# Altium PCB BB_OPAMP.PcbDoc
Units mil, origin at the board's own origin, x right, y up, seen from the top; angles counter-clockwise.
Board outline 1496.06 x 1692.91 mil, 2 copper layers (Top Layer, Bottom Layer); 70 components, 23 nets, 147 pads, 42 vias.
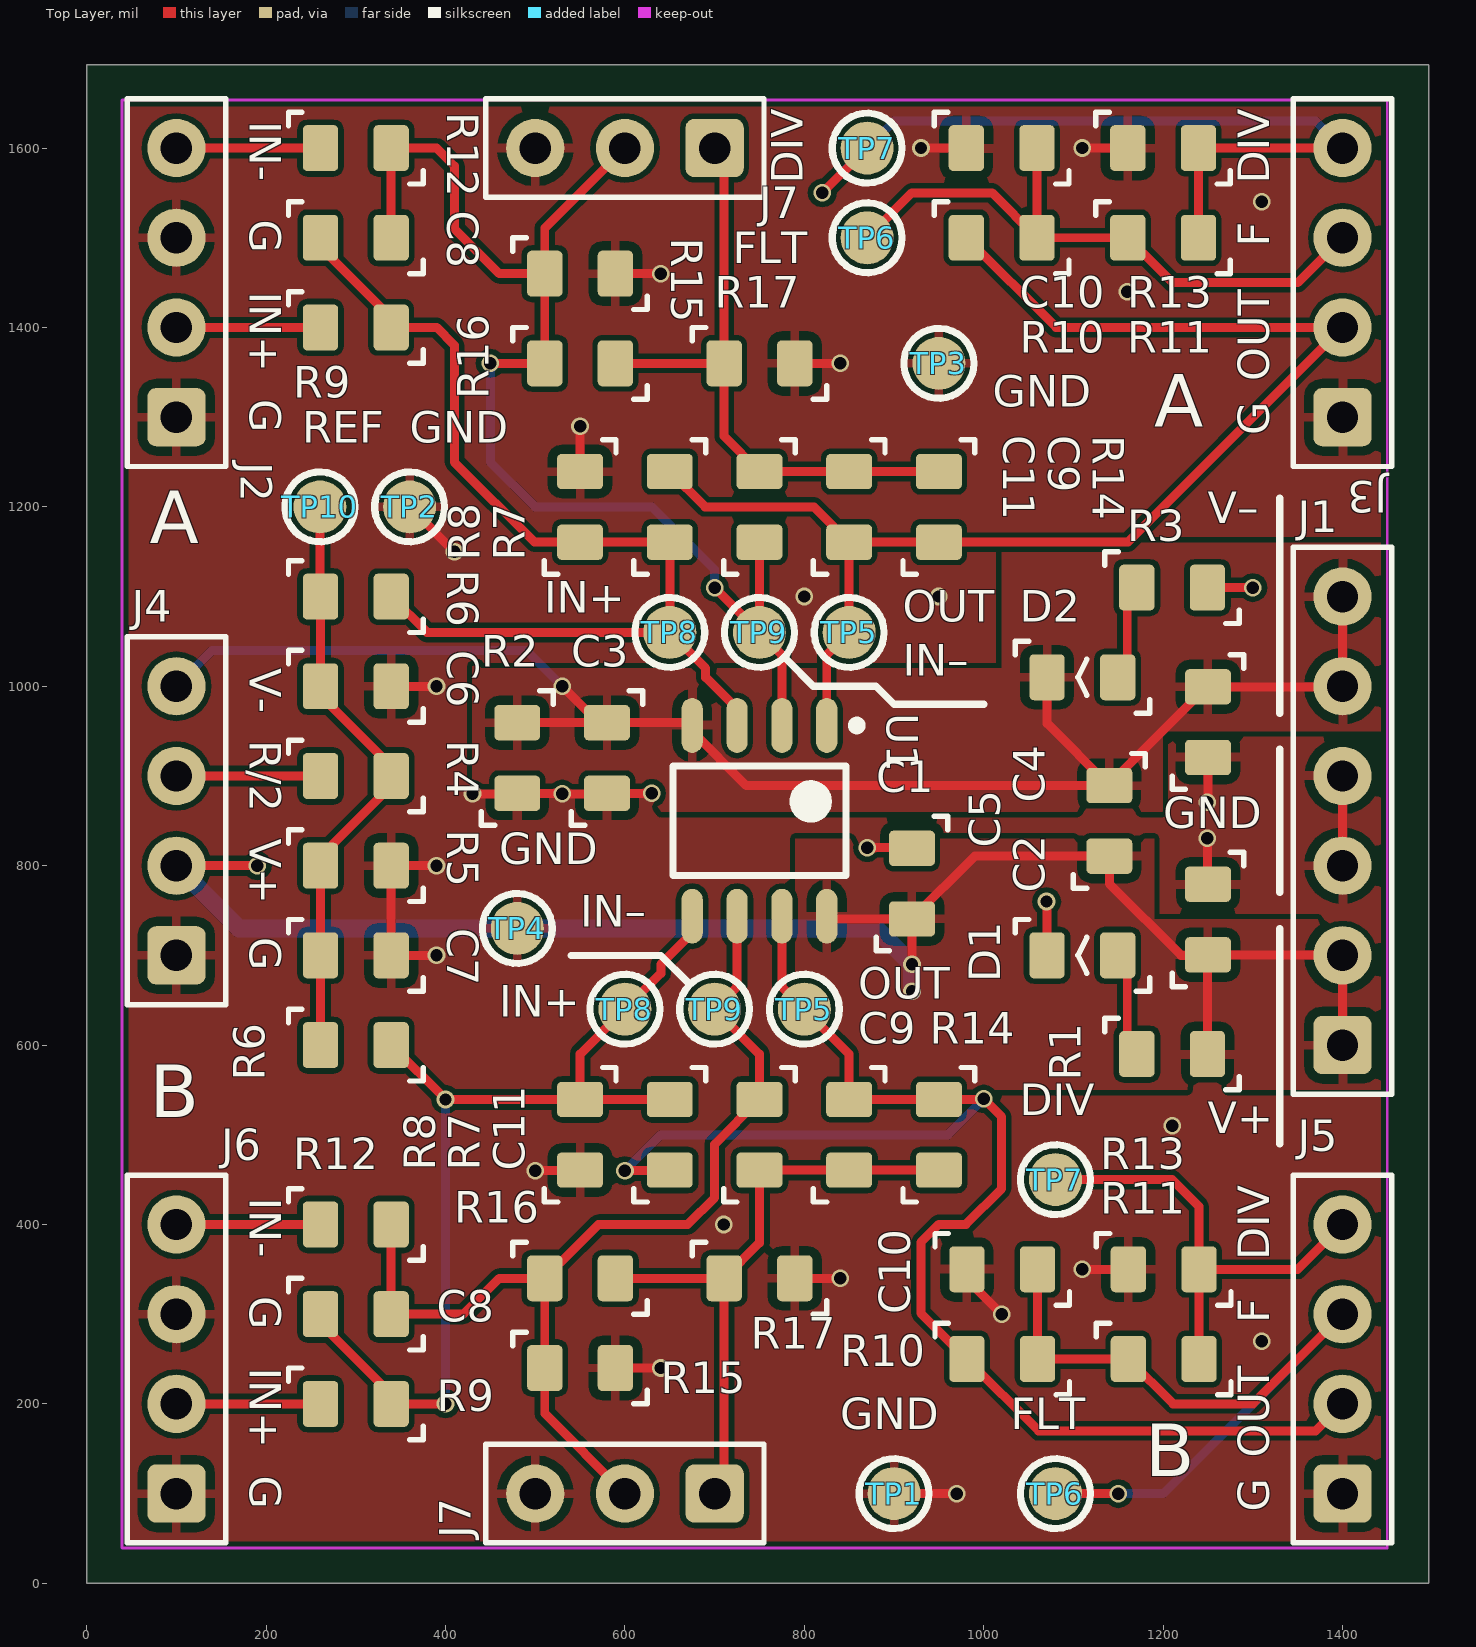
[diagram p0: Top Layer view]
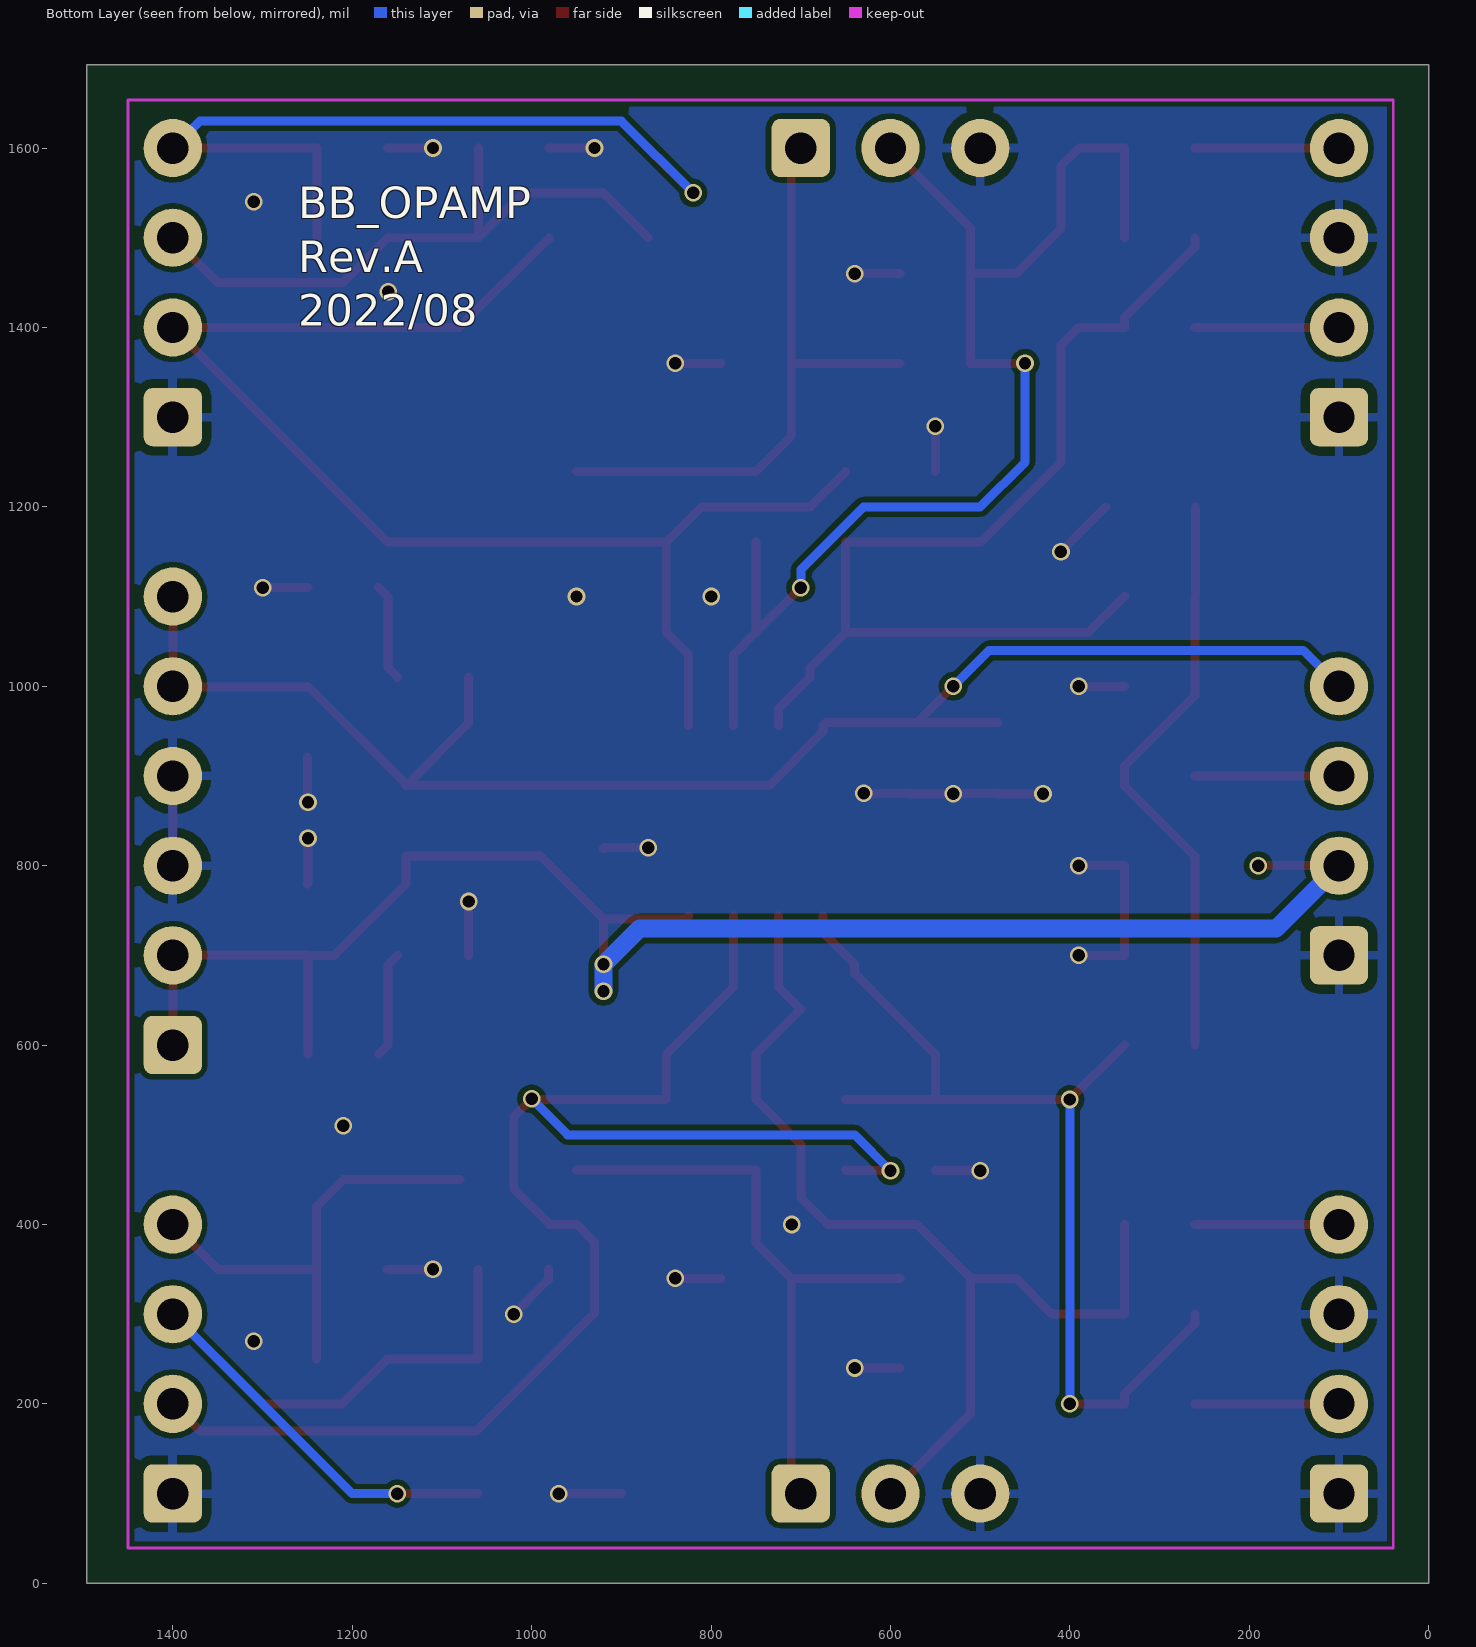
[diagram p1: Bottom Layer view, seen from below]
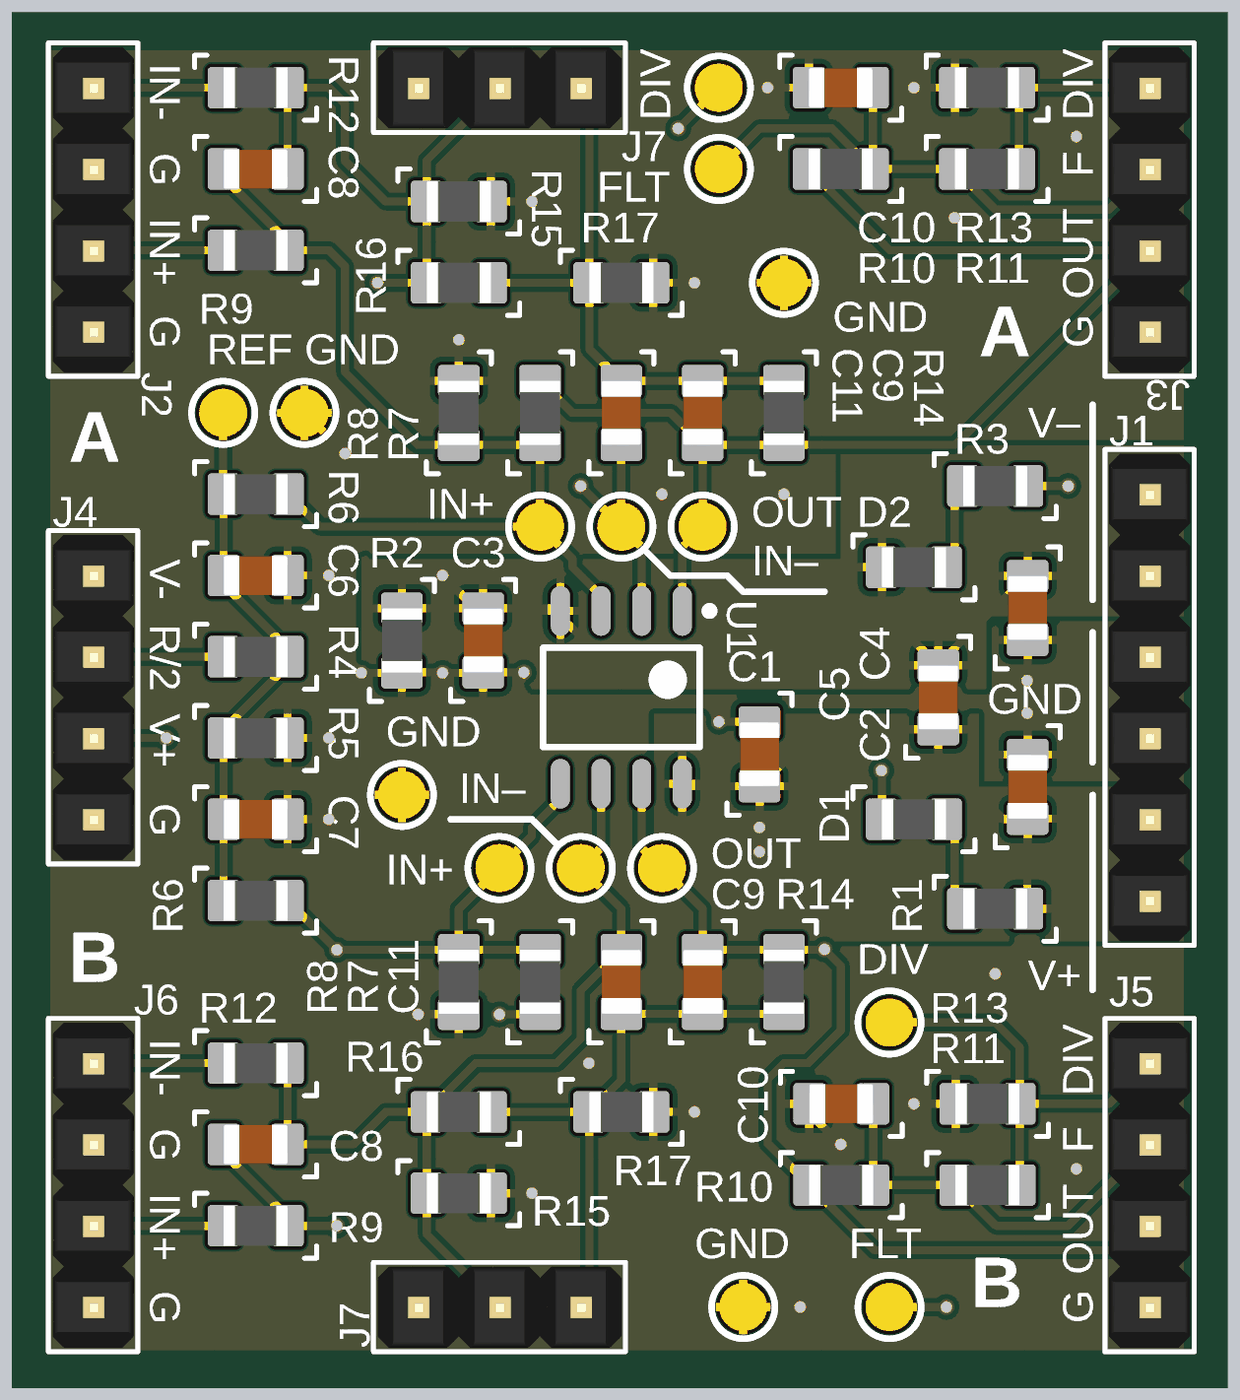
[diagram p2: 3D render of the assembled board from above, using the file's embedded part models]

## Layer stack, top to bottom
Top Solder: solder mask 0.4, Solder Resist, Dk 3.5
Top Layer: signal copper 1.4
Dielectric 1: dielectric 12.6, FR-4, Dk 4.8
Bottom Layer: signal copper 1.4
Bottom Solder: solder mask 0.4, Solder Resist, Dk 3.5

## Board outline
0,0 0,1692.91 1496.06,1692.91 1496.06,0

## Design rules (kind name [scope] priority, off if disabled: settings)
Clearance [All] p1: gap=6 ignorepadtopadclearanceinfootprint=FALSE
PolygonConnect [All] p1: thpad.connectstyle=Relief thpad.reliefconductorwidth=10 thpad.reliefentries=4 thpad.polygonreliefangle="90 Angle" thpad.airgapwidth=10 smdpad.connectstyle=Relief smdpad.reliefconductorwidth=10 smdpad.reliefentries=4 smdpad.polygonreliefangle="90 Angle" smdpad.airgapwidth=10 via.connectstyle=Direct via.reliefconductorwidth=10 via.reliefentries=4 via.polygonreliefangle="90 Angle" via.airgapwidth=10
RoomDefinition B [InComponentClass('B')] p1 off: confinementstyle=ConfineIn formatcopy=TRUE lockcomponents=FALSE outline -280,-560 1690,-560 1690,-90 -280,-90
RoomDefinition A [InComponentClass('A')] p2 off: confinementstyle=ConfineIn formatcopy=TRUE lockcomponents=FALSE outline -230,1730 1640,1730 1640,2310 -230,2310
RoutingVias [All] p1: holewidth=28 width=50 viastyle="Through Hole" minholewidth=28 minwidth=50 maxholewidth=28 maxwidth=50
SolderMaskExpansion [All] p1: expansion=4
UnRoutedNet [All] p1: checkbadconnections=TRUE
Width [All] p1: maxlimit=20 minlimit=6 preferedwidth=10
29 further rules are at their usual default settings.

## Classes and differential pairs
channel class Analog: A B
component class B: C8 C9 C10 C11 J7 R6 R7 R8 R9 R10 R11 R12 R13 R14 R15 R16 R17 TP5 TP6 TP7 TP8 TP9
component class A: C8 C9 C10 C11 J7 R6 R7 R8 R9 R10 R11 R12 R13 R14 R15 R16 R17 TP5 TP6 TP7 TP8 TP9
component class Breakout: C1 C2 C3 C4 C5 C6 C7 D1 D2 J1 J2 J3 J4 J5 J6 J8 R1 R2 R3 R4 R5 TP1 TP2 TP3 TP4 TP10 U1

## Components (designator, comment, footprint, x,y, rotation, side; value= is the part's Value field where it differs from the comment)
C1 "100nF" 0805C_RF_M 920,780 r270 top
C2 "10uF" 0805C_RF_M 1250,740 r270 top
C3 "100nF" 0805C_RF_M 580,920 r90 top
C4 "10uF" 0805C_RF_M 1250,960 r90 top
C5 "100nF" 0805C_RF_M 1140,850 r270 top
C6 "100nF" 0805C_RF_M 300,1000 r180 top
C7 "10uF" 0805C_RF_M 300,700 r180 top
C8 "? F" 0805C_RF_M 300,1500 r0 top
C8 "? F" 0805C_RF_M 300,300 r0 top
C9 "? F" 0805C_RF_M 850,1200 r270 top
C9 "? F" 0805C_RF_M 850,500 r90 top
C10 "? F" 0805C_RF_M 1020,1600 r0 top
C10 "? F" 0805C_RF_M 1020.63,350 r0 top
C11 "? F" 0805C_RF_M 750,1200 r270 top
C11 "? F" 0805C_RF_M 750,500 r90 top
D1 "Unspecified" 0805LED_RF_M 1110,700 r0 top
D2 "Unspecified" 0805LED_RF_M 1110,1010 r0 top
J1 "PINHDR-6P1" HEADER-2.54-6P1 1400,850 r90 top locked
J2 "INA" HEADER-2.54-4P1 100,1450 r90 top locked
J3 "OUTA" HEADER-2.54-4P1 1400,1450 r90 top locked
J4 "PINHDR-4P1" HEADER-2.54-4P1 100,850 r90 top locked
J5 "OUTB" HEADER-2.54-4P1 1400,250 r90 top locked
J6 "INB" HEADER-2.54-4P1 100,250 r90 top locked
J7 "Gain" HEADER-2.54-3P1 600,1600 r180 top locked
J7 "Gain" HEADER-2.54-3P1 600,100 r180 top locked
R1 "2K2" 0805R_RF_M 1210,590 r180 top
R2 "0R" 0805R_RF_M 480,920 r90 top
R3 "2K2" 0805R_RF_M 1210,1110 r0 top
R4 "2K5" 0805R_RF_M 300,900 r180 top
R5 "2K5" 0805R_RF_M 300,800 r180 top
R6 "? R" 0805R_RF_M 300,1100 r0 top
R6 "? R" 0805R_RF_M 300,600 r0 top
R7 "? R" 0805R_RF_M 650,1200 r270 top
R7 "? R" 0805R_RF_M 650,500 r90 top
R8 "? R" 0805R_RF_M 550,1200 r90 top
R8 "? R" 0805R_RF_M 550,500 r270 top
R9 "? R" 0805R_RF_M 300,1400 r180 top
R9 "? R" 0805R_RF_M 300,200 r180 top
R10 "? R" 0805R_RF_M 1020,1500 r0 top
R10 "? R" 0805R_RF_M 1020.63,250 r0 top
R11 "? R" 0805R_RF_M 1200,1500 r0 top
R11 "? R" 0805R_RF_M 1200.63,250 r0 top
R12 "? R" 0805R_RF_M 300,1600 r0 top
R12 "? R" 0805R_RF_M 300,400 r0 top
R13 "? R" 0805R_RF_M 1200,1600 r0 top
R13 "? R" 0805R_RF_M 1200.63,350 r0 top
R14 "? R" 0805R_RF_M 950,1200 r270 top
R14 "? R" 0805R_RF_M 950,500 r90 top
R15 "? R" 0805R_RF_M 550,1460 r180 top
R15 "? R" 0805R_RF_M 550,240 r180 top
R16 "? R" 0805R_RF_M 550,1360 r0 top
R16 "? R" 0805R_RF_M 550,340 r0 top
R17 "? R" 0805R_RF_M 750,1360 r180 top
R17 "? R" 0805R_RF_M 750,340 r180 top
TP1 "GND" PAD_R_1.5MM 900,100 r0 top
TP2 "GND" PAD_R_1.5MM 360,1200 r0 top
TP3 "GND" PAD_R_1.5MM 950,1360 r0 top
TP4 "GND" PAD_R_1.5MM 480,730 r0 top
TP5 "OUT" PAD_R_1.5MM 850,1060 r90 top
TP5 "OUT" PAD_R_1.5MM 800,640 r90 top
TP6 "FLT" PAD_R_1.5MM 870,1500 r90 top
TP6 "FLT" PAD_R_1.5MM 1080,100 r90 top
TP7 "DIV" PAD_R_1.5MM 870,1600 r90 top
TP7 "DIV" PAD_R_1.5MM 1080,450 r90 top
TP8 "IN+" PAD_R_1.5MM 650,1060 r90 top
TP8 "IN+" PAD_R_1.5MM 600,640 r90 top
TP9 "IN–" PAD_R_1.5MM 750,1060 r90 top
TP9 "IN–" PAD_R_1.5MM 700,640 r90 top
TP10 "REF" PAD_R_1.5MM 260,1200 r90 top
U1 "MCP6002-I/SN" SOIC-8 750,850 r270 top

## Footprints (in the part's own frame and the unit in brackets; to place one, negate y for a bottom-side part, rotate by r counter-clockwise, add the part's x,y. Pads: shape width x height; smd on the part's side, far side on the other; paste and mask are expansions set on the pad)
0805C_RF_M [mm] "Chip Capacitor 0805 Reflow Medium"
  rrect25% 1x1.3 smd: 1(-1,0) 2(1,0)
  silkscreen extent -1.91,-1.02 1.91,1.02, body extent -1,-0.62 1.01,0.63, height 0.94
0805LED_RF_M [mm] "Chip LED 0805 Reflow Medium"
  rrect25% 1x1.3 smd: A(1,0) C(-1,0)
  silkscreen extent -1.91,-1.02 1.91,1.02, body extent -1,-0.62 1,0.63, height 0.6
0805R_RF_M [mm] "Chip Resistor 0805 Reflow Medium"
  rrect25% 1x1.3 smd: 1(-1,0) 2(1,0)
  silkscreen extent -1.91,-1.02 1.91,1.02, body extent -1,-0.62 1,0.63, height 0.6
HEADER-2.54-3P1 [mil] "Pin Header Single Row 3 Positions Pitch 2.54 mm"
  rrect30% 65x65 hole 35: 1(-100,0)
  round 65 hole 35: 2(0,0) 3(100,0)
  silkscreen extent -155,-55 155,55, body extent -150,-50 150,50, height 362
HEADER-2.54-4P1 [mil] "Pin Header Single Row 4 Positions Pitch 2.54 mm"
  rrect30% 65x65 hole 35: 1(-150,0)
  round 65 hole 35: 2(-50,0) 3(50,0) 4(150,0)
  silkscreen extent -205,-55 205,55, body extent -200,-50 200,50, height 362
HEADER-2.54-6P1 [mil] "Pin Header Single Row 6 Positions Pitch 2.54 mm"
  rrect30% 65x65 hole 35: 1(-250,0)
  round 65 hole 35: 2(-150,0) 3(-50,0) 4(50,0) 5(150,0) 6(250,0)
  silkscreen extent -305,-55 305,55, body extent -300,-50 300,50, height 362
PAD_R_1.5MM [mm] "Pad Rounded 1.5mm"
  round 1.5 smd paste-10: 1(0,0)
  silkscreen extent -0.99,-0.99 0.99,0.99
SOIC-8 [mm]
  oval 1.55x0.6 smd: 1(-2.7,1.905) 2(-2.7,0.635) 3(-2.7,-0.635) 4(-2.7,-1.905) 5(2.7,-1.905) 6(2.7,-0.635) 7(2.7,0.635) 8(2.7,1.905)
  silkscreen extent -2.82,-2.45 1.55,2.88, body extent -1.95,-2.45 1.95,2.45, height 1.75

## Part data
C1 C2 C3 C4 C5 C6 C7 C8 C8 C9 C9 C10 C10 C11 C11: library part C, "Capacitor", Manufacturer="Generic Brand", Max Voltage="? V", Tolerance=?, Category=Capacitor, Mounting Technology=SMT, Supplier Link=http://
D1 D2: library part LED, "LED", Forward Voltage Drop="? V", Manufacturer="Generic Brand", Category=Diode, Emitting Color=Unspecified, Mounting Technology=SMT, Supplier Link=http://
J1: "Pin Header Single Row 6 Positions", Mounting Technology=THT
J2 J3 J5 J6: library part PINHDR-4P1, "Generic Pin Header 4x1"
J4: "Generic Pin Header 4x1"
J7 J7: library part PINHDR-3P1, "Generic Pin Header 3x1"
R1 R2 R3 R4 R5 R6 R6 R7 R7 R8 R8 R9 R9 R10 R10 R11 R11 R12 R12 R13 R13 R14 R14 R15 R15 R16 R16 R17 R17: library part R, "Resistor", Manufacturer="Generic Brand", Max Voltage="? V", Power Rating="? W", Tolerance=?, Category=Resistor, Mounting Technology=SMT, Supplier Link=http://
TP1 TP2 TP3 TP4 TP5 TP5 TP6 TP6 TP7 TP7 TP8 TP8 TP9 TP9 TP10: library part "Test Point", "Test Point / Pad"
U1: "IC OPAMP GP 2 CIRCUIT 8SOIC", DIGIKEY_PART_NO=MCP6002-I/SN-ND, DIGIKEY_UNIT_PRICE=$0.33, DIGIKEY_URL=https://www.digikey.com/en/products/detail/microchip-technology/MCP6002-I-SN/500876

## Via types
v1: diameter 19.68, hole 13.78, Top Layer to Bottom Layer, tented both sides, 42 vias

## Nets (pads, with @x,y where several pads share a name; then routed paths per layer and width w, separated by ;. In a path a pad name is that pad's centre, name@x,y a point inside that pad or via, vN(x,y) a via of type N, cw(c..) or ccw(c..) an arc to the next point about the centre after c; other vN are vias at no path point)
FBKN: C8.2@339.37,300 C11.2@750,539.37 J7.2@600,100 R12.2@339.37,400 R15.2@510.63,240 R16.1@510.63,340 TP9.1@700,640 U1.6 | length 1157
  Top Layer w10: R12.2@339.37,400 339.37,300 420,300 460,340 R16.1@510.63,340 ; J7.2@600,100 510.63,189.37 510.63,240 R16.1@510.63,340 ; U1.6 725,665 700,640 750,590 750,539.37 700,489.37 700,430 670,400 570.63,400 R16.1@510.63,340
FBKN: C8.2@339.37,1500 C11.2@750,1160.63 J7.2@600,1600 R12.2@339.37,1600 R15.2@510.63,1460 R16.1@510.63,1360 TP9.1@750,1060 U1.2 | length 1423
  Top Layer w10: C8.2@339.37,1500 339.37,1600 390,1600 410,1580 410,1510 460,1460 R15.2@510.63,1460 ; v1(450,1360) 510.63,1360 R15.2@510.63,1460 ; J7.2@600,1600 510.63,1510.63 R15.2@510.63,1460 ; v1(700,1110) TP9.1@750,1060 ; C11.2@750,1160.63 TP9.1@750,1060 ; U1.2 775,1035 TP9.1@750,1060
  Bottom Layer w10: v1(450,1360) 450,1250 500,1200 630,1200 700,1130 v1(700,1110)
FBKN_PRE: C9.1@850,1239.37 C11.1@750,1239.37 J7.1@700,1600 R14.1@950,1239.37 R16.2@589.37,1360 R17.2@710.63,1360 | length 702.6
  Top Layer w10: R16.2@589.37,1360 R17.2@710.63,1360 ; J7.1@700,1600 710.63,1589.37 R17.2@710.63,1360 ; R14.1@950,1239.37 850,1239.37 750,1239.37 710.63,1278.74 R17.2@710.63,1360
FBKN_PRE: C9.1@850,460.63 C11.1@750,460.63 J7.1@700,100 R14.1@950,460.63 R16.2@589.37,340 R17.2@710.63,340 | length 702.6
  Top Layer w10: R16.2@589.37,340 R17.2@710.63,340 ; J7.1@700,100 710.63,110.63 R17.2@710.63,340 ; R14.1@950,460.63 850,460.63 750,460.63 750,379.37 R17.2@710.63,340
FBKP: C8.1@260.63,300 R6.2@339.37,600 R7.2@650,539.37 R8.1@550,539.37 R9.1@339.37,200 TP8.1@600,640 U1.5 | length 1124.5
  Top Layer w10: C8.1@260.63,300 260.63,289.37 339.37,210.63 339.37,200 v1(400,200) ; R6.2@339.37,600 v1(400,539.37) R8.1@550,539.37 ; R7.2@650,539.37 R8.1@550,539.37 ; U1.5 675,725 640,690 640,680 600,640 550,590 R8.1@550,539.37
  Bottom Layer w10: v1(400,200) v1(400,539.37)
FBKP: C8.1@260.63,1500 R6.2@339.37,1100 R7.2@650,1160.63 R8.1@550,1160.63 R9.1@339.37,1400 TP8.1@650,1060 U1.3 | length 1181.1
  Top Layer w10: C8.1@260.63,1500 260.63,1489.37 339.37,1410.63 339.37,1400 390,1400 410,1380 410,1250 499.37,1160.63 550,1160.63 650,1160.63 TP8.1@650,1060 ; R6.2@339.37,1100 379.37,1060 TP8.1@650,1060 ; U1.3 725,975 690,1010 690,1020 TP8.1@650,1060
GND: C1.1 C2.1 C3.1 C4.1 C6.1 C7.1 C10.1 D1.C J1.3 J1.4 J2.1 J2.3 J3.1 J4.1 J5.1 J6.1 J6.3 J7.3 R2.1 R3.2 R5.1 R8.2 R13.1 R15.1 R17.1 TP1.1 TP2.1 TP3.1 TP4.1 | length 1478.3
  Top Layer w10: C6.1 v1(390,1000) ; TP2.1 v1(410,1150) ; v1(390,700) C7.1 R5.1 v1(390,800) ; v1(430,880) 479.37,880 R2.1 529.37,880.63 v1(530,880) 579.37,880 C3.1 v1(630,880.63) ; v1(500,460) 549.37,460 R8.2@550,460.63 ; R8.2@550,1239.37 v1(550,1290) ; R15.1@589.37,240 v1(640,240) ; R15.1@589.37,1460 v1(640,1460) ; R17.1@789.37,340 v1(840,340) ; R17.1@789.37,1360 v1(840,1360) ; v1(870,820) 919.37,820 C1.1 ; TP1.1 v1(970,100) ; v1(930,1600) C10.1@980.63,1600 ; C10.1@981.26,350 981.26,338.74 v1(1020,300) ; v1(1070,760) 1070.63,759.37 D1.C ; v1(1110,350) R13.1@1161.26,350 ; v1(1110,1600) R13.1@1160.63,1600 ; v1(1249.37,830.63) 1249.37,780 C2.1 ; v1(1249.37,870.63) 1250,871.26 C4.1 ; R3.2 v1(1300,1110) ; J1.3 J1.4
  other v1: 1310,270 710,400 1210,510 800,1100 950,1100 1160,1440 1310,1540
IN_A_N: J2.4 R12.1@260.63,1600 | length 160.6
  Top Layer w10: J2.4 R12.1@260.63,1600
IN_A_P: J2.2 R9.2@260.63,1400 | length 160.6
  Top Layer w10: J2.2 R9.2@260.63,1400
IN_B_N: J6.4 R12.1@260.63,400 | length 160.6
  Top Layer w10: J6.4 R12.1@260.63,400
IN_B_P: J6.2 R9.2@260.63,200 | length 160.6
  Top Layer w10: J6.2 R9.2@260.63,200
NetD1_A: D1.A R1.2 | length 118.8
  Top Layer w10: D1.A 1160,689.37 1160,600.63 R1.2
NetD2_A: D2.A R3.1 | length 108.8
  Top Layer w10: D2.A 1160,1020.63 1160,1099.37 R3.1
OUT: C9.2@850,539.37 J5.2 R7.1@650,460.63 R10.1@981.26,250 R14.2@950,539.37 TP5.1@800,640 U1.7 | length 1707.7
  Top Layer w10: v1(600,460) 649.37,460 R7.1@650,460.63 ; U1.7 775,665 800,640 850,590 850,539.37 950,539.37 999.37,539.37 v1(1000,540) 1020,520 1020,440 980,400 950,400 930,380 930,301.26 981.26,250 1061.26,170 1370,170 J5.2
  Bottom Layer w10: v1(600,460) 640,500 960,500 v1(1000,540)
OUT: C9.2@850,1160.63 J3.2 R7.1@650,1239.37 R10.1@980.63,1500 R14.2@950,1160.63 TP5.1@850,1060 U1.1 | length 1558.1
  Top Layer w10: R7.1@650,1239.37 689.37,1200 810.63,1200 C9.2@850,1160.63 ; U1.1 825,1035 850,1060 C9.2@850,1160.63 ; R10.1@980,1499.37 980.63,1500 1080.63,1400 J3.2 1160.63,1160.63 950,1160.63 C9.2@850,1160.63
OUT_A_DIV: J3.4 R11.2@1239.37,1500 R13.2@1239.37,1600 TP7.1@870,1600 | length 956.9
  Top Layer w10: v1(820,1550) TP7.1@870,1600 ; R11.2@1239.37,1500 1239.37,1600 J3.4
  Bottom Layer w10: v1(820,1550) 900,1630 1370,1630 J3.4
OUT_A_FLT: C10.2@1059.37,1600 J3.3 R10.2@1059.37,1500 R11.1@1160.63,1500 TP6.1@870,1500 | length 712.8
  Top Layer w10: TP6.1@870,1500 920,1550 1009.37,1550 R10.2@1059.37,1500 ; C10.2@1059.37,1600 R10.2@1059.37,1500 ; J3.3 1350,1450 1210.63,1450 1160.63,1500 R10.2@1059.37,1500
OUT_B_DIV: J5.4 R11.2@1240,250 R13.2@1240,350 TP7.1@1080,450 | length 523.1
  Top Layer w10: TP7.1@1080,450 1210,450 1240,420 R13.2@1240,350 ; R11.2@1240,250 R13.2@1240,350 ; J5.4 1350,350 R13.2@1240,350
OUT_B_FLT: C10.2@1060,350 J5.3 R10.2@1060,250 R11.1@1161.26,250 TP6.1@1080,100 | length 925
  Top Layer w10: TP6.1@1060,100 1080,100 v1(1150,100) ; C10.2@1060,350 1060,250 1161.26,250 1211.26,200 1300,200 J5.3
  Bottom Layer w10: v1(1150,100) 1200,100 J5.3
VDD: C1.2 C2.2 C5.2 J1.1 J1.2 J4.2 R1.1 U1.8 | length 1915.7
  Top Layer w10: J4.2 v1(190,800) ; U1.8 828.07,740.63 C1.2 ; v1(920,690) C1.2 ; R1.1 C2.2@1249.37,700 ; J1.1 J1.2 1399.37,700.63 C2.2 C2.2@1249.37,700 ; C1.2 990,810.63 C5.2 1140,780 1220,700 C2.2@1249.37,700
  Bottom Layer w20: J4.2 170,730 880,730 v1(920,690) v1(920,660)
VREF: C6.2 C7.2 R4.1 R5.2 R6.1 TP10.1 | length 665.5
  Top Layer w10: TP10.1 260,1100.63 260.63,1100 C6.2 260.63,989.37 339.37,910.63 R4.1 339.37,889.37 260.63,810.63 R5.2 C7.2 R6.1@260.63,600
VREF_IN: J4.3 R4.2 | length 160.6
  Top Layer w10: J4.3 R4.2
VSS: C3.2 C4.2 C5.1 D2.C J1.5 J1.6 J4.4 R2.2 U1.4 | length 1770.8
  Top Layer w10: R2.2 C3.2@570.63,959.37 ; v1(530,1000) C3.2@570.63,959.37 ; D2.C@1070,1009.37 D2.C 1070.63,958.74 C5.1 ; J1.6 J1.5 1399.37,999.37 C4.2 1249.37,1000 1140,890.63 C5.1 ; C3.2@570.63,959.37 C3.2 671.93,959.37 U1.4 675,949.68 735.31,889.37 C5.1
  Bottom Layer w10: J4.4 140,1040 490,1040 v1(530,1000)

## Polygon pours and split planes (outlines as drawn)
VDD on Top Layer "NONET_L-01_P-001" (solid, remove dead copper, pour order 6): 790,830 1190,830 1190,740 1450,740 1450,550 790,550
VSS on Top Layer "NONET_L-01_P-001" (solid, remove dead copper, pour order 8): 430,1030 440,1020 1020,1020 1020,1160 1450,1160 1450,950 1199.37,950 1199.37,860.63 1200,860 430,860
GND on Top Layer "NONET_L-01_P-001" (solid, remove dead copper, pour order 10): 10,1680 1480,1680 1480,10 10,10
GND on Bottom Layer "NONET_L-01_P-001" (solid, remove dead copper, pour order 4): 10,1680 1480,1680 1480,10 10,10

## Keep-outs
Keep-Out Layer:
  lines w3: 39.37,39.37 1450,39.37 1450,1653.54 39.37,1653.54 39.37,39.37

## Silkscreen, mask and mechanical layers (free items; w line width, h text height)
Top Overlay:
  lines w8: 540,700 640,700 670,670 ; 780,1030 810,1000 880,1000 900,980 1000,980 ; 1330,490 1330,730 ; 1330,770 1330,930 ; 1330,970 1330,1210
  text "IN-" at 170,1630 h60 r270
  text "DIV" at 1330,1560 h60 r90
  text "G" at 170,1520 h60 r270
  text "F" at 1330,1490 h60 r90
  text "IN+" at 170,1440 h60 r270
  text "OUT" at 1330,1340 h60 r90
  text "G" at 170,1320 h60 r270
  text "G" at 1330,1280 h60 r90
  text "A" at 1190,1270 h100
  text "V–" at 1250,1170 h60
  text "A" at 70,1140 h100
  text "V-" at 170,1020 h60 r270
  text "R/2" at 170,940 h60 r270
  text "V+" at 170,830 h60 r270
  text "GND" at 1200,830 h60
  text "G" at 170,720 h60 r270
  text "B" at 70,500 h100
  text "V+" at 1250,490 h60
  text "IN-" at 170,430 h60 r270
  text "DIV" at 1330,360 h60 r90
  text "G" at 170,320 h60 r270
  text "F" at 1330,290 h60 r90
  text "IN+" at 170,240 h60 r270
  text "OUT" at 1330,140 h60 r90
  text "G" at 170,120 h60 r270
  text "B" at 1180,100 h100
  text "G" at 1330,80 h60 r90
Bottom Overlay:
  text "BB_OPAMP" at 1260,1510 h60
  text "Rev.A" at 1260,1450 h60
  text "2022/08" at 1260,1390 h60
Mechanical 1:
  the board outline again, w3